# Altium PCB PCB - Break-Out.PcbDoc
Units mm, origin at the board's own origin, x right, y up, seen from the top; angles counter-clockwise.
Board outline 230 x 230 mm, 6 copper layers (Top Layer, Layer 2, Layer 3, Layer 4, Layer 5, Bottom Layer), stack 1.538 mm thick; 8 components, 247 nets, 205 pads, 0 vias.
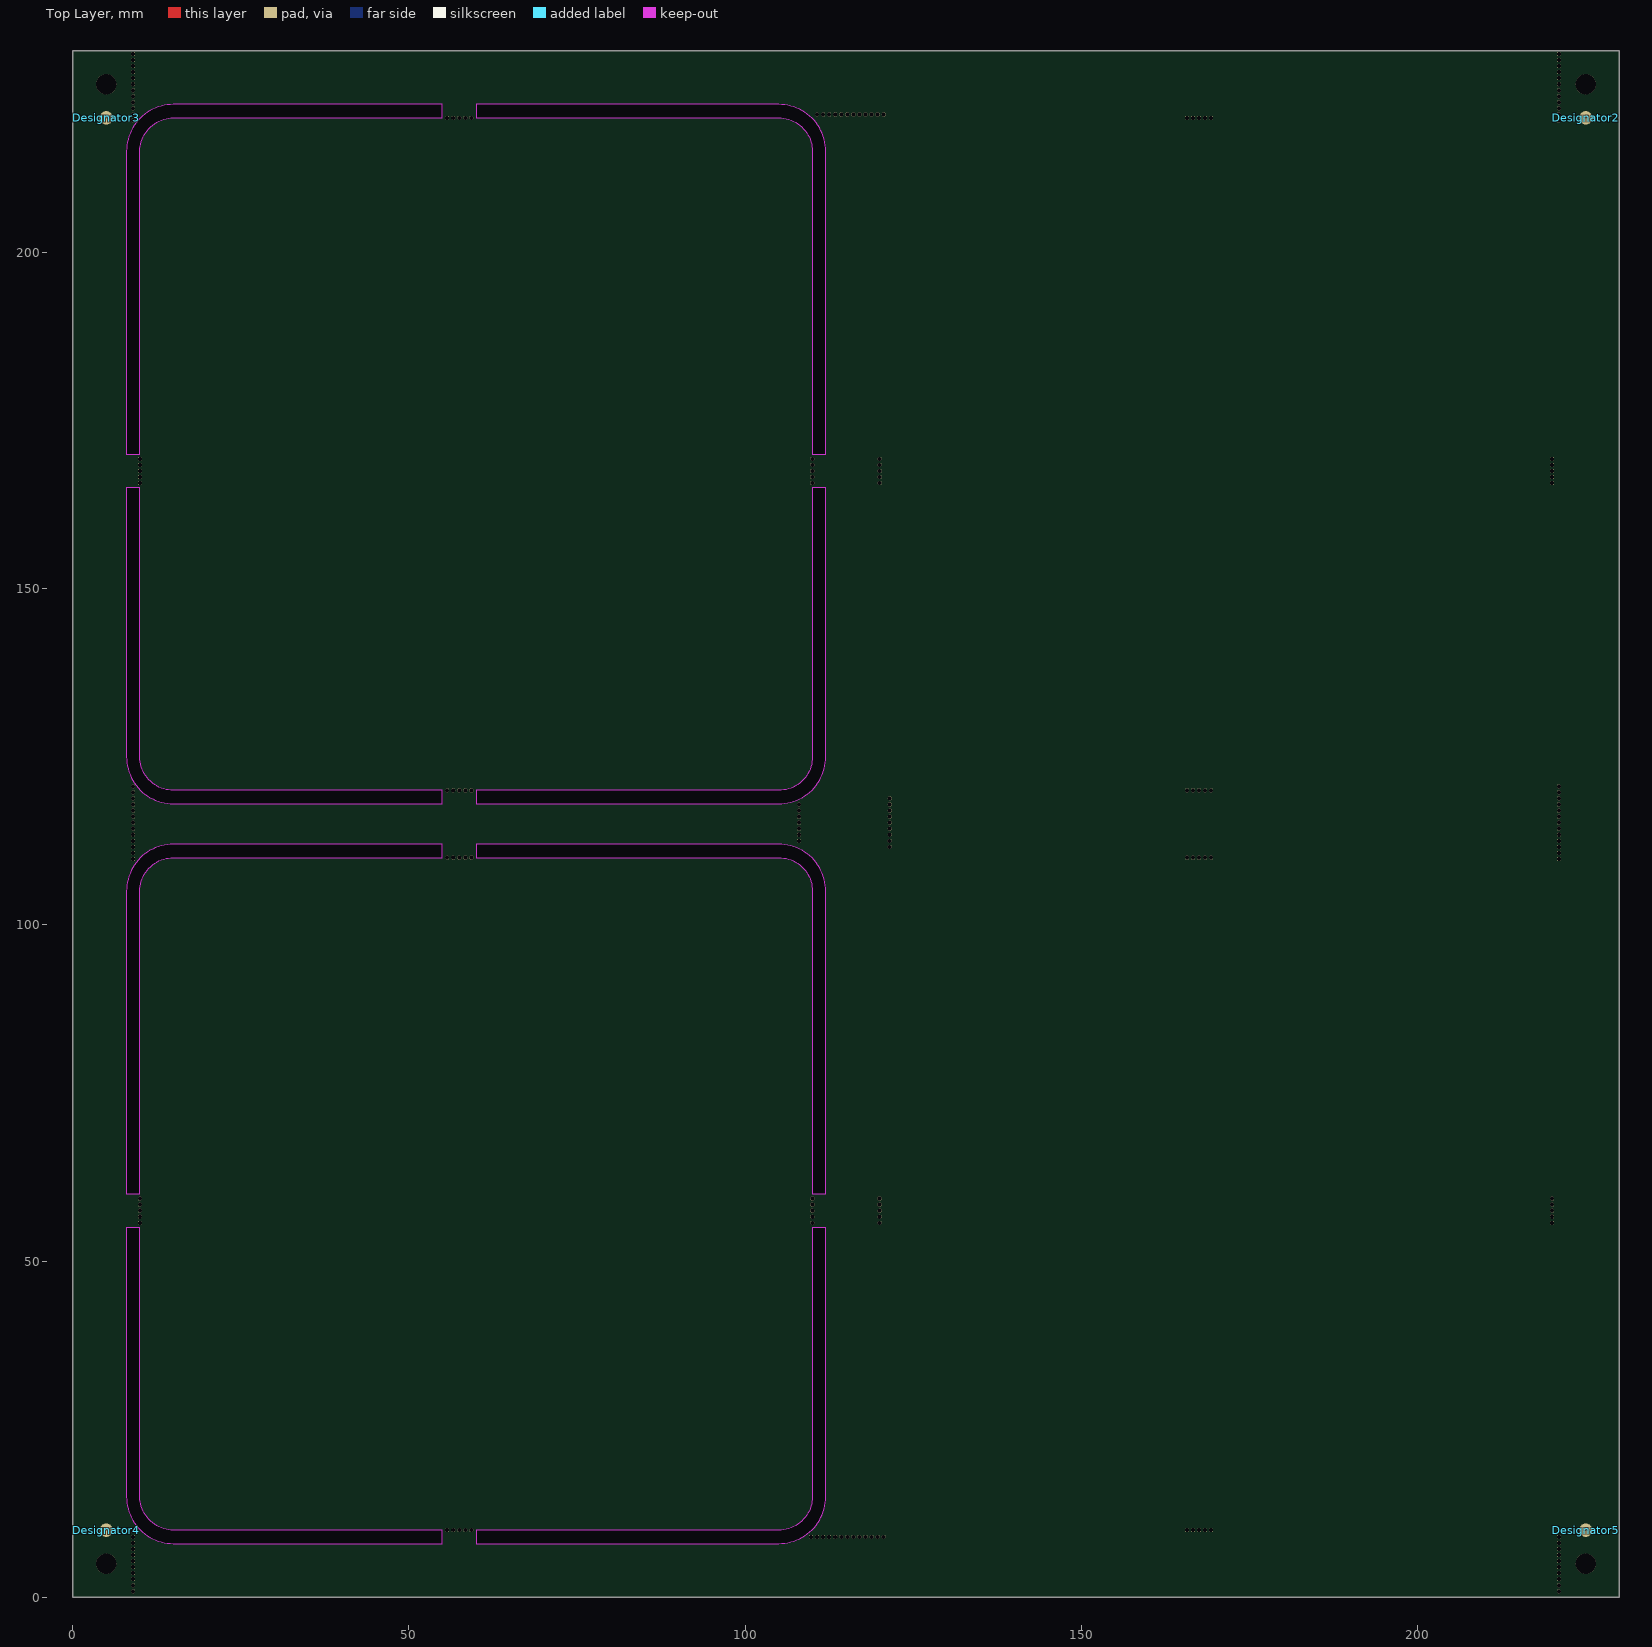
[diagram p0: Top Layer view]
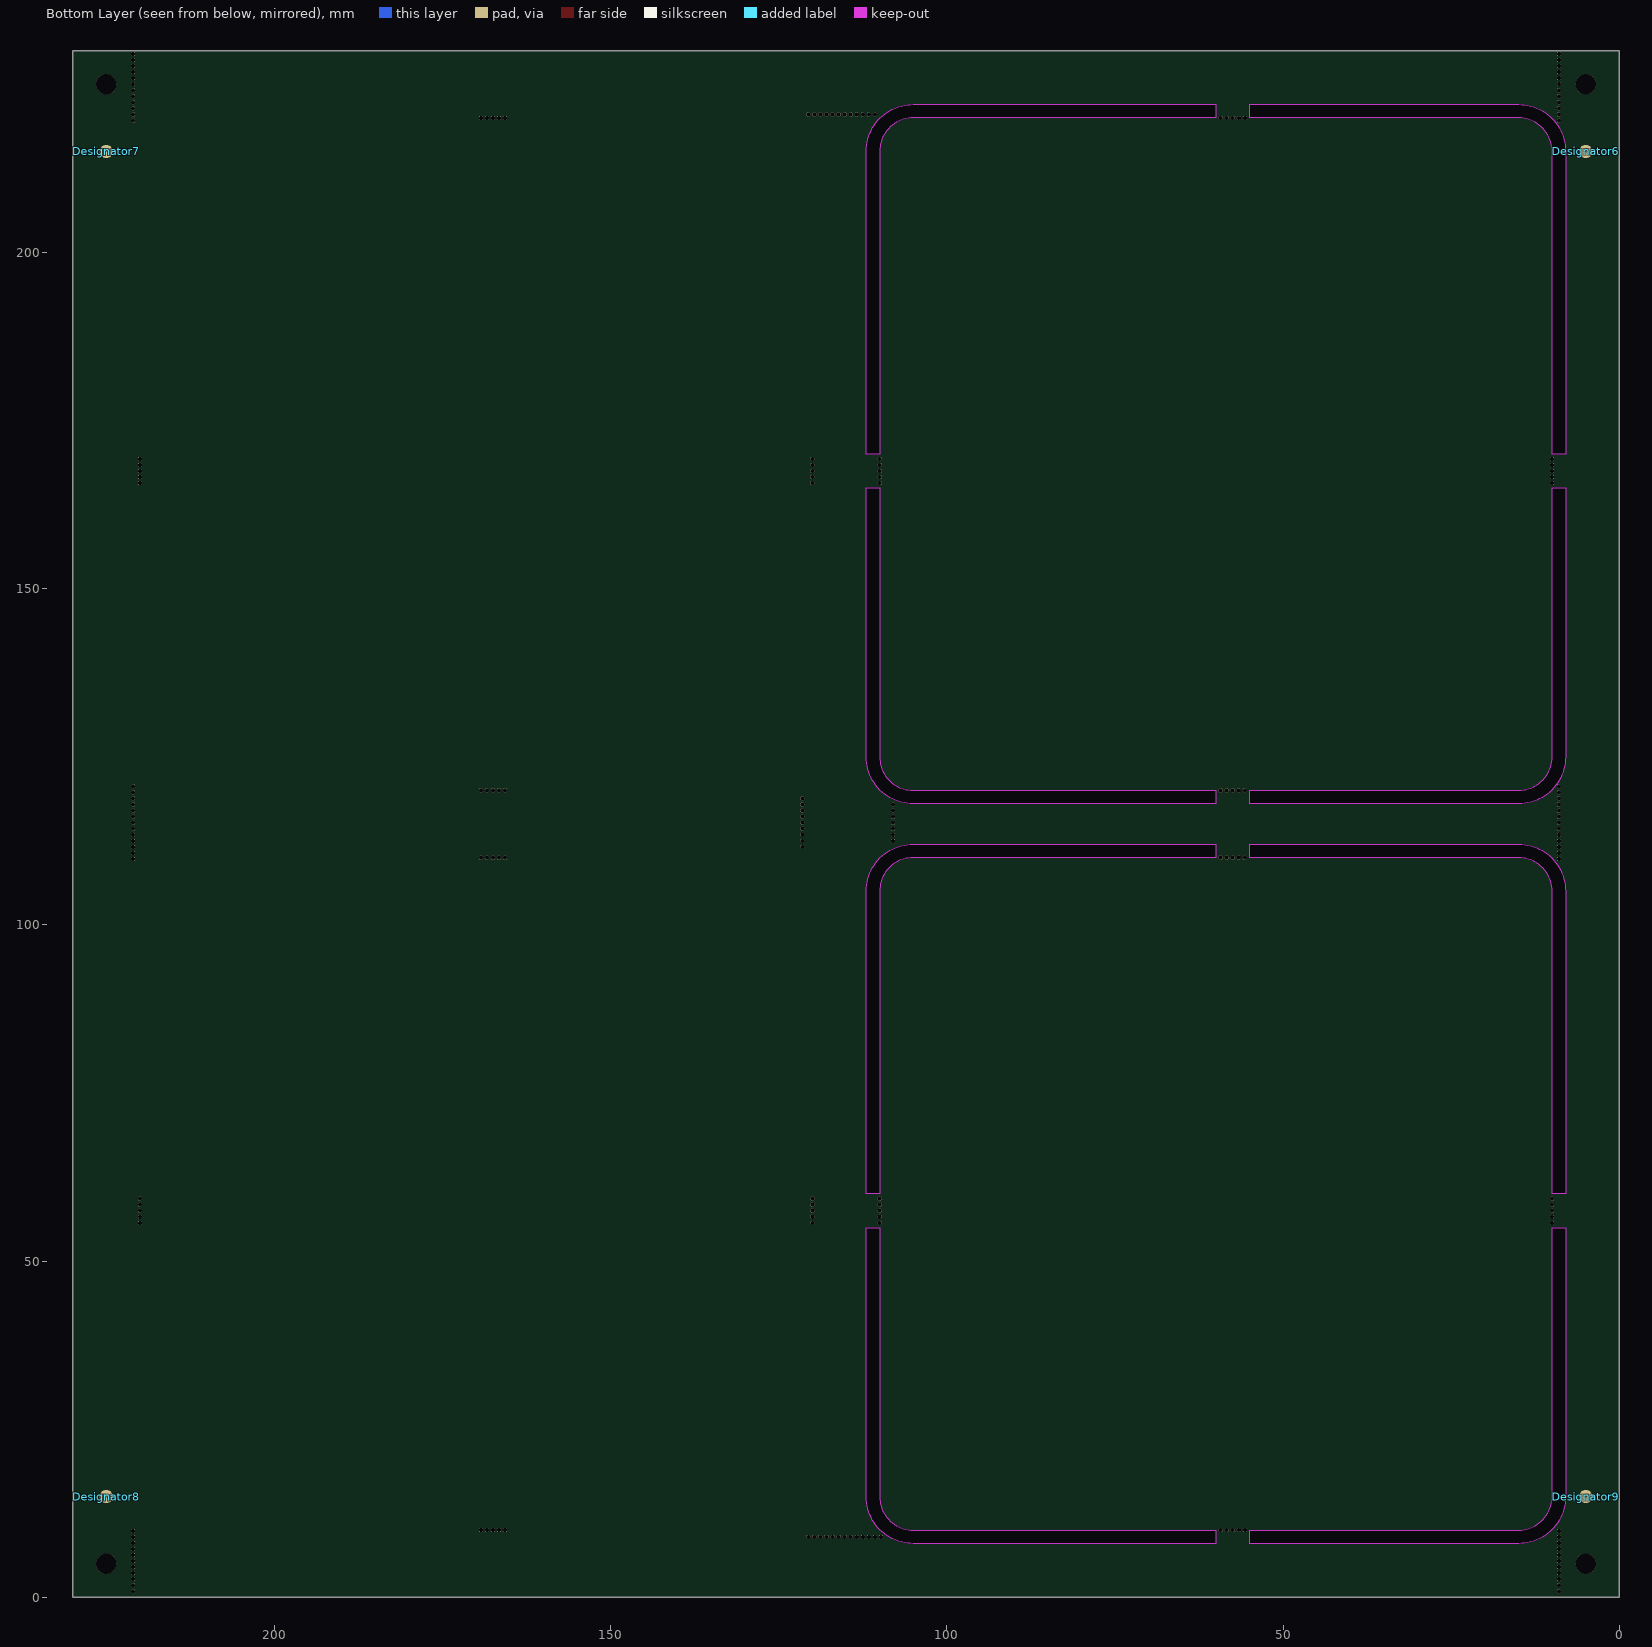
[diagram p1: Bottom Layer view, seen from below]
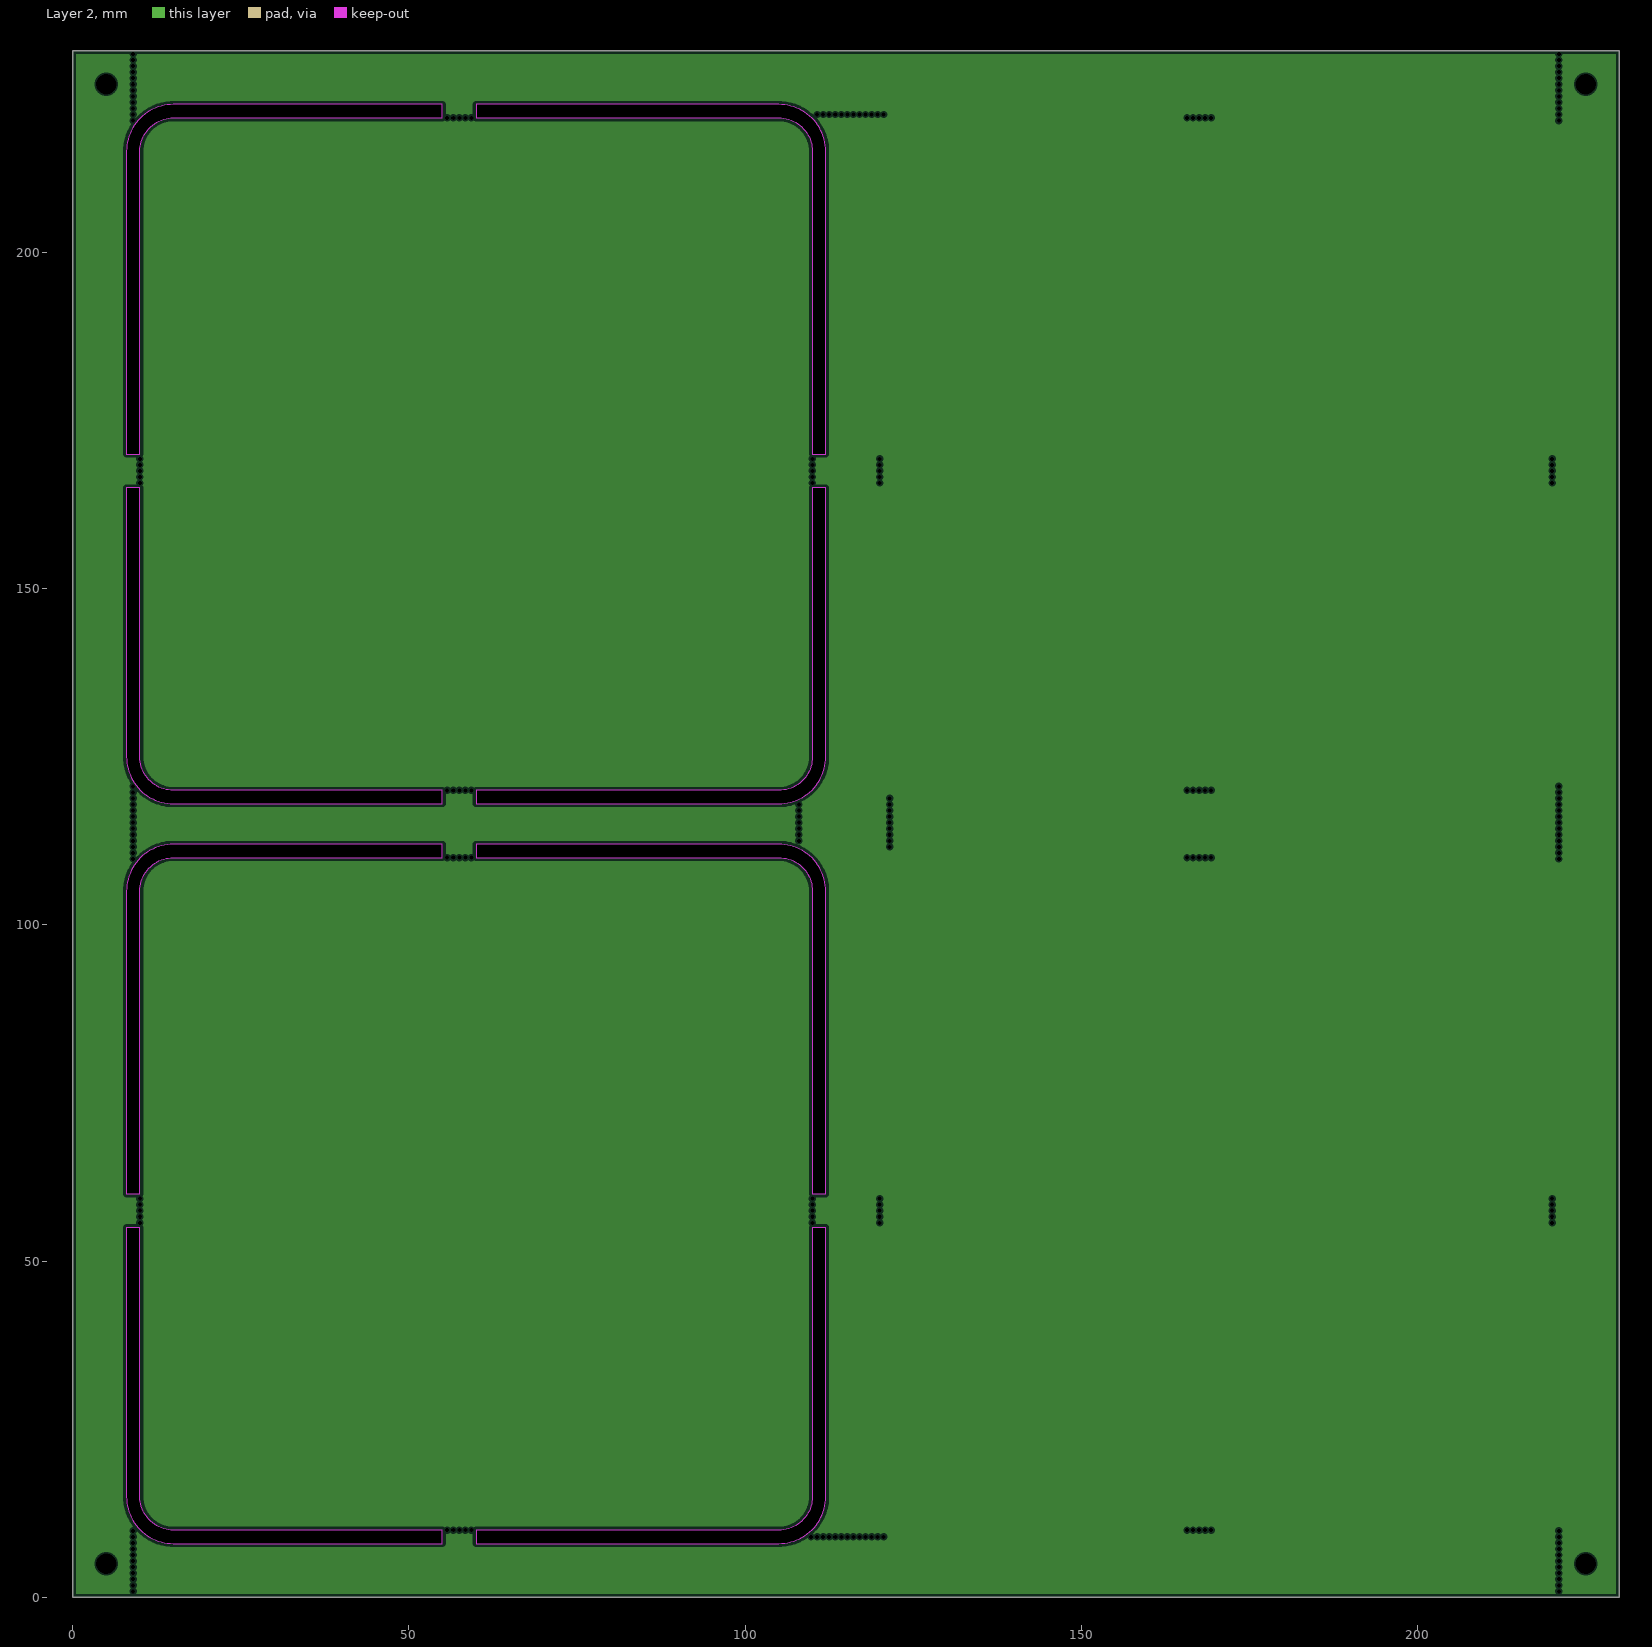
[diagram p2: Layer 2, clearances drawn from the general rule]
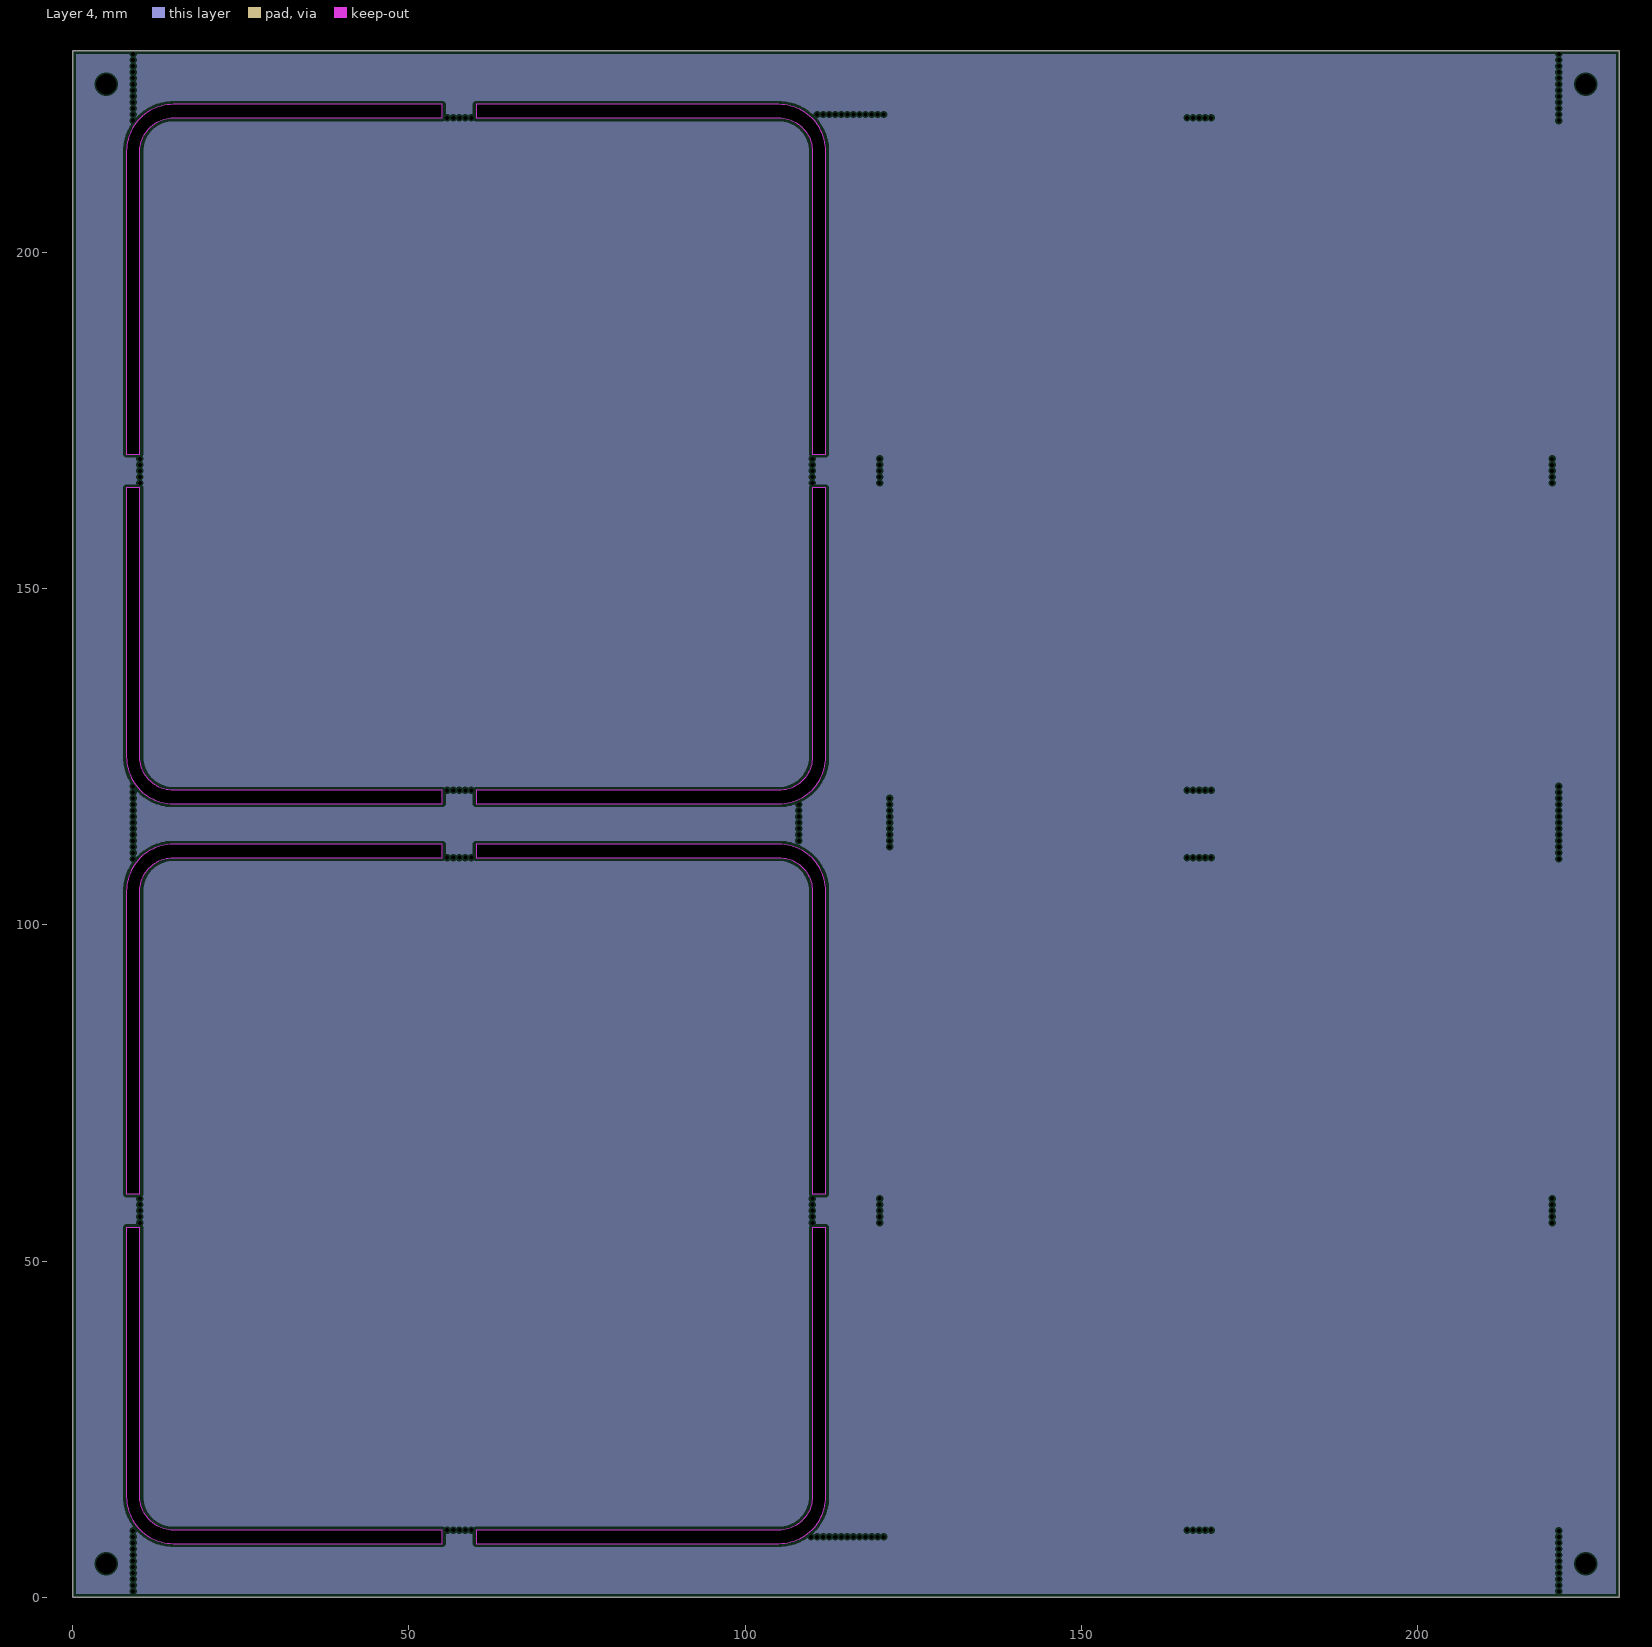
[diagram p3: Layer 4, clearances drawn from the general rule]
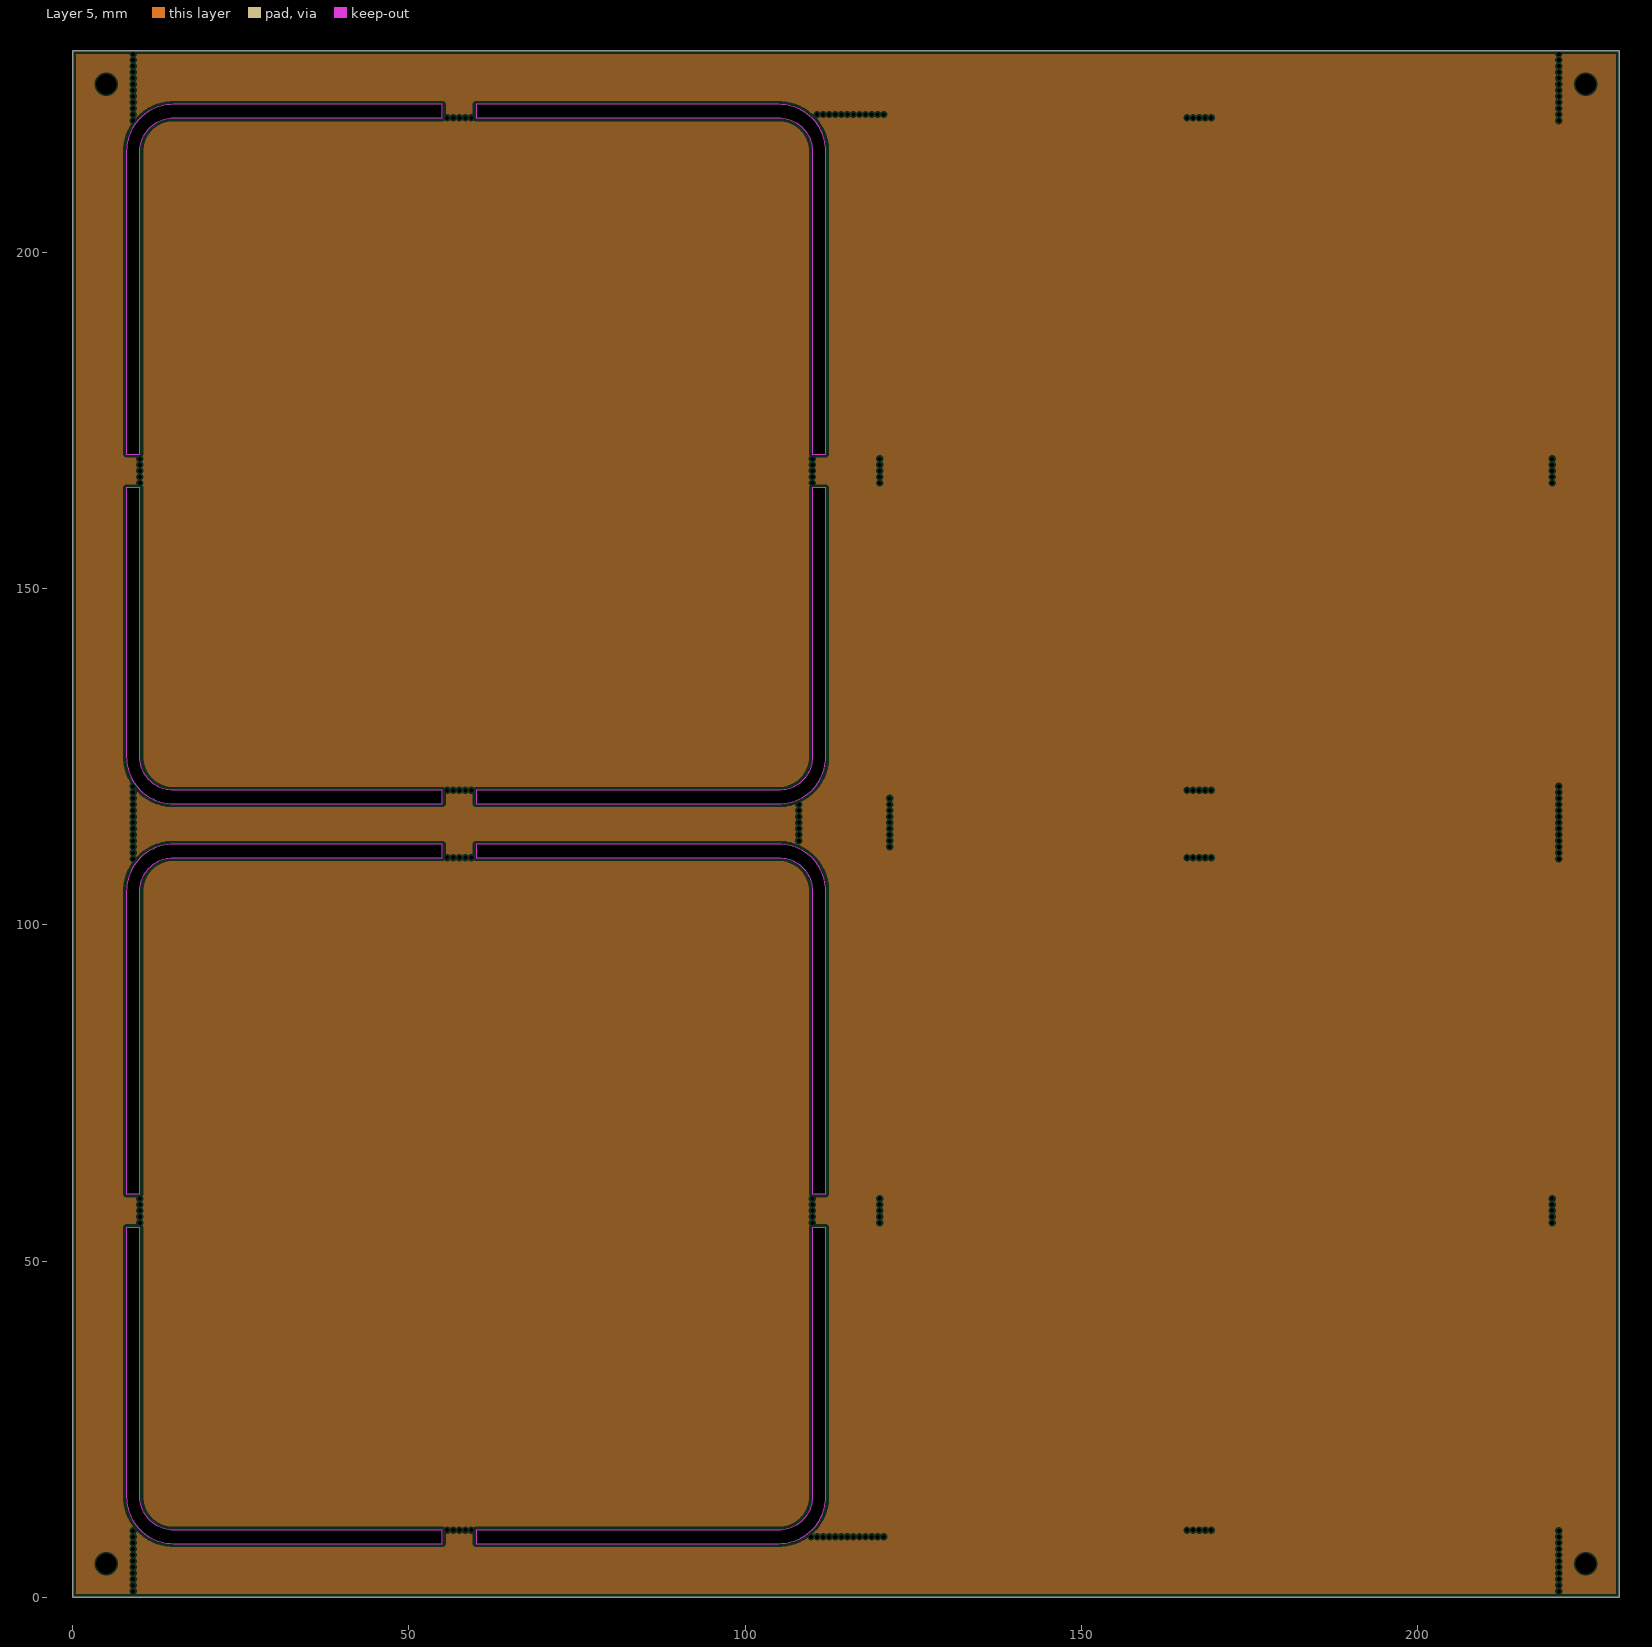
[diagram p4: Layer 5, clearances drawn from the general rule]

## Layer stack, top to bottom
Top Solder: solder mask 0.01, Solder Resist, Dk 3.5
Top Layer: signal copper 0.035
Dielectric 2: prepreg 0.0994, 3313*1, Dk 4.1
Layer 2: plane copper 0.0152, net Gnd
Dielectric 4: core 0.55, Core, Dk 4.1
Layer 3: signal copper 0.0152
Dielectric 1: prepreg 0.1088, 2116*1, Dk 4.8
Layer 4: plane copper 0.0152, net 3.3V
Dielectric 5: core 0.55, Core, Dk 4.1
Layer 5: plane copper 0.0152, net Gnd
Dielectric 3: prepreg 0.0994, 3313*1, Dk 4.1
Bottom Layer: signal copper 0.035
Bottom Solder: solder mask 0.01, Solder Resist, Dk 3.5

## Board outline
0,230 230,230 230,0 0,0
cut-out: 10,60 10,105 cw(c15,105) 15,110 55,110 55,112 15,112 ccw(c15,105) 8,105 8,60
cut-out: 55,10 15,10 cw(c15,15) 10,15 10,55 8,55 8,15 ccw(c15,15) 15,8 55,8
cut-out: 110,55 110,15 cw(c105,15) 105,10 60,10 60,8 105,8 ccw(c105,15) 112,15 112,55
cut-out: 60,110 105,110 cw(c105,105) 110,105 110,60 112,60 112,105 ccw(c105,105) 105,112 60,112
cut-out: 60,220 105,220 cw(c105,215) 110,215 110,170 112,170 112,215 ccw(c105,215) 105,222 60,222
cut-out: 110,165 110,125 cw(c105,125) 105,120 60,120 60,118 105,118 ccw(c105,125) 112,125 112,165
cut-out: 55,120 15,120 cw(c15,125) 10,125 10,165 8,165 8,125 ccw(c15,125) 15,118 55,118
cut-out: 10,170 10,215 cw(c15,215) 15,220 55,220 55,222 15,222 ccw(c15,215) 8,215 8,170

## Design rules (kind name [scope] priority, off if disabled: settings)
BoardOutlineClearance [Not OnLayer('Top Overlay')] p1: gap=0.3 ignorepadtopadclearanceinfootprint=FALSE
Clearance Polygons [InNet('Gnd') vs (InNet('Gcan') Or InNet('Chassis'))] p1: gap=0.2 ignorepadtopadclearanceinfootprint=FALSE except(0.127: SMDPad-SMDPad; 1: Poly-Poly)
Clearance [All] p2: gap=0.2 ignorepadtopadclearanceinfootprint=FALSE except(0.127: SMDPad-SMDPad)
DiffPairsRouting "Usb 90 Ohm" [InDifferentialPairClass('Usb_90')] p1: maxlimit=0.203 minlimit=0.203 mostfreqgap=0.203 toplayer_minwidth=0.158 toplayer_maxwidth=0.158 toplayer_prefwidth=0.158 midlayer1_minwidth=0.321 midlayer1_maxwidth=0.321 midlayer1_prefwidth=0.321 bottomlayer_minwidth=0.158 bottomlayer_maxwidth=0.158 bottomlayer_prefwidth=0.158 maxuncoupledlength=12.7
DiffPairsRouting "Rs422-Can 120 Ohm" [InDifferentialPairClass('Rs422_120') Or InDifferentialPairClass('Can_120')] p2: maxlimit=0.508 minlimit=0.508 mostfreqgap=0.508 toplayer_minwidth=0.096 toplayer_maxwidth=0.098 toplayer_prefwidth=0.097 midlayer1_minwidth=0.261 midlayer1_maxwidth=0.261 midlayer1_prefwidth=0.261 bottomlayer_minwidth=0.096 bottomlayer_maxwidth=0.098 bottomlayer_prefwidth=0.097 maxuncoupledlength=12.7
DiffPairsRouting "Eth 100 Ohm" [InDifferentialPairClass('Eth_100')] p3: maxlimit=0.203 minlimit=0.203 mostfreqgap=0.203 toplayer_minwidth=0.124 toplayer_maxwidth=0.124 toplayer_prefwidth=0.124 midlayer1_minwidth=0.232 midlayer1_maxwidth=0.232 midlayer1_prefwidth=0.232 bottomlayer_minwidth=0.124 bottomlayer_maxwidth=0.124 bottomlayer_prefwidth=0.124 maxuncoupledlength=12.7
HoleSize "Mounting Hole" [HasFootprint('Mounting Hole - Hole-3.2mm, Pad-5mm')] p1: absolutevalues=TRUE maxlimit=5 minlimit=0.29 maxpercent=80.000 minpercent=20.000
HoleSize "USB Conn" [HasFootprint('GCT, USB4056')] p2: absolutevalues=TRUE maxlimit=5 minlimit=0.29 maxpercent=80.000 minpercent=20.000
HoleSize NonViaHoleSize [Not IsVia] p3: absolutevalues=TRUE maxlimit=5 minlimit=0.5 maxpercent=80.000 minpercent=20.000
HoleSize ViaHoleSize [IsVia] p4: absolutevalues=TRUE maxlimit=5 minlimit=0.3 maxpercent=80.000 minpercent=20.000
HoleToHoleClearance "Mounting Hole (Clearance)" [HasFootprint('Mounting Hole - Hole-3.2mm, Pad-5mm') vs HasFootprint('Mounting Hole - Hole-3.2mm, Pad-5mm')] p1: gap=0.29 allowstackedmicrovias=TRUE
HoleToHoleClearance "USB Conn (Clearance)" [HasFootprint('GCT, USB4056') vs HasFootprint('GCT, USB4056')] p2: gap=0.39 allowstackedmicrovias=TRUE
HoleToHoleClearance [All] p3: gap=0.5 allowstackedmicrovias=TRUE
MatchedLengths LM-EthP [InNetClass('EthP')] p1: tolerance=1 checknetsindiffpair=FALSE checkdiffpairvsdiffpair=TRUE checkxsignals=TRUE checkothers=TRUE
MatchedLengths LM-EthC [InNetClass('EthC')] p2: tolerance=1 checknetsindiffpair=FALSE checkdiffpairvsdiffpair=TRUE checkxsignals=TRUE checkothers=TRUE
MatchedLengths LM-EthP_Dp [InNetClass('EthP')] p3: tolerance=1 checknetsindiffpair=TRUE checkdiffpairvsdiffpair=FALSE checkxsignals=FALSE checkothers=FALSE
MatchedLengths LM-EthC_Dp [InNetClass('EthC')] p4: tolerance=1 checknetsindiffpair=TRUE checkdiffpairvsdiffpair=FALSE checkxsignals=FALSE checkothers=FALSE
MatchedLengths SPI-LM [InxSignalClass('xSPI')] p5: tolerance=1 checknetsindiffpair=FALSE checkdiffpairvsdiffpair=TRUE checkxsignals=TRUE checkothers=TRUE
MatchedLengths LM-I2C [InNetClass('I2C_LM')] p6: tolerance=1 checknetsindiffpair=FALSE checkdiffpairvsdiffpair=TRUE checkxsignals=TRUE checkothers=TRUE
MinimumAnnularRing [All] p1: minimumring=0.05
MinimumSolderMaskSliver [All] p1: minsoldermaskwidth=0.1
PlaneClearance [All] p1: clearance=0.25
PlaneConnect [All] p1: planeconnectstyle=Direct reliefexpansion=0.508 reliefentries=4 reliefconductorwidth=0.254 reliefairgap=0.254
PolygonConnect [All] p1: thpad.connectstyle=Relief thpad.reliefconductorwidth=0.254 thpad.reliefentries=4 thpad.polygonreliefangle="90 Angle" thpad.airgapwidth=0.25 smdpad.connectstyle=Relief smdpad.reliefconductorwidth=0.254 smdpad.reliefentries=4 smdpad.polygonreliefangle="90 Angle" smdpad.airgapwidth=0.25 via.connectstyle=Direct via.reliefconductorwidth=0.254 via.reliefentries=4 via.polygonreliefangle="90 Angle" via.airgapwidth=0.25
RoutingVias [All] p1: holewidth=0.711 width=1.27 viastyle="Through Hole" minholewidth=0.711 minwidth=1.27 maxholewidth=0.711 maxwidth=1.27
SilkToSilkClearance [Not HasFootprint('Logo 1') vs Not HasFootprint('Logo 1')] p1: silktosilkclearance=0.05
SilkToSolderMaskClearance [IsPad And (Not HasFootprint('Resistor_Smd_M1005_I0402'))] p1: minsilkscreentomaskgap=0.15 clearancetoexposedcopper=TRUE
SolderMaskExpansion [All] p1: expansion=0.05 istentingtop=FALSE
Width [All] p1: maxlimit=10 minlimit=0.089 preferedwidth=0.2 minimp=50.000000 maximp=50.000000 favimp=50.000000
22 further rules are at their usual default settings.

## Classes and differential pairs
net class EthP: RXP_N RXP_P TXP_N TXP_P
net class EthC: RXC_N RXC_P TXC_N TXC_P
net class I2C_LM: PB6 PB7
differential pair class Usb_90: U Usb
differential pair class Rs422_120: AB CTS RTS YZ
differential pair class Eth_100: RXC RXP TXC TXP
differential pair class Can_120: CAN
channel class Switch: Sw1 Sw2 Sw3
channel class "Led Driver": LdG LdO LdR LdY
channel class Button: Bt1 Bt2 Bt3
net class PE[0..15]: PE0 PE1 PE2 PE3 PE4 PE5 PE6 PE7 PE8 PE9 PE10 PE11 PE12 PE13 PE14 PE15
net class PD[0..15]: PD0 PD1 PD2 PD3 PD4 PD5 PD6 PD7 PD8 PD9 PD10 PD11 PD12 PD13 PD14 PD15
net class PC[0..15]: PC0 PC1 PC2 PC3 PC4 PC5 PC6 PC7 PC8 PC9 PC10 PC11 PC12 PC13 PC14 PC15
net class PB[0..15]: PB0 PB1 PB2 PB3 PB4 PB5 PB6 PB7 PB8 PB9 PB10 PB11 PB12 PB13 PB14 PB15
net class PA[0..15]: PA0 PA1 PA2 PA3 PA4 PA5 PA6 PA7 PA8 PA9 PA10 PA11 PA12 PA13 PA14 PA15
differential pair YZ: +YZ_P -YZ_N
differential pair U: +U_P -U_N
differential pair Usb: +Usb_P -Usb_N
differential pair TXP: +TXP_P -TXP_N
differential pair TXC: +TXC_P -TXC_N
differential pair RXP: +RXP_P -RXP_N
differential pair RXC: +RXC_P -RXC_N
differential pair RTS: +RTS_P -RTS_N
differential pair CTS: +CTS_P -CTS_N
differential pair CAN: +CAN_P -CAN_N
differential pair AB: +AB_P -AB_N

## Components (designator, comment, footprint, x,y, rotation, side; value= is the part's Value field where it differs from the comment)
Designator2 "Comment" "Fiducial, Panel - 2mm, 5mm" 225,220 r0 top
Designator3 "Comment" "Fiducial, Panel - 2mm, 5mm" 5,220 r0 top
Designator4 "Comment" "Fiducial, Panel - 2mm, 5mm" 5,10 r0 top
Designator5 "Comment" "Fiducial, Panel - 2mm, 5mm" 225,10 r0 top
Designator6 "Comment" "Fiducial, Panel - 2mm, 5mm" 5,215 r180 bottom
Designator7 "Comment" "Fiducial, Panel - 2mm, 5mm" 225,215 r180 bottom
Designator8 "Comment" "Fiducial, Panel - 2mm, 5mm" 225,15 r180 bottom
Designator9 "Comment" "Fiducial, Panel - 2mm, 5mm" 5,15 r180 bottom

## Footprints (in the part's own frame and the unit in brackets; to place one, negate y for a bottom-side part, rotate by r counter-clockwise, add the part's x,y. Pads: shape width x height; smd on the part's side, far side on the other; paste and mask are expansions set on the pad)
"Fiducial, Panel - 2mm, 5mm" [mm] "Fiducial, Panel - 2mm, 5mm"
  round 2 smd paste+0 mask+1.5: TP(0,0)
  Top Layer pour cut-out: 2.5,2.5 0.915,3.415 -0.915,3.415 -2.5,2.5 -2.5,2.5 -3.266,1.353 -3.536,0 -3.266,-1.353 -2.5,-2.5 -2.5,-2.5 -1.353,-3.266 0,-3.536 1.353,-3.266 2.5,-2.5 2.5,-2.5 3.415,-0.915 3.415,0.915 2.5,2.5

## Free pads (board coordinates)
  round 3 hole 3 unplated: 0(5,5) 0(5,225) 0(225,5) 0(225,225)
  round 0.6 hole 0.6 unplated: 0(9,0.9) 0(9,1.8) 0(9,2.7) 0(9,3.6) 0(9,4.5) 0(9,5.4) 0(9,6.3) 0(9,7.2) 0(9,8.1) 0(9,9) 0(9,9.9) 0(9,109.8) 0(9,110.7) 0(9,111.6) 0(9,112.5) 0(9,113.4) 0(9,114.3) 0(9,115.2) 0(9,116.1) 0(9,117) 0(9,117.9) 0(9,118.8) 0(9,119.7) 0(9,120.6) 0(9,219.6) 0(9,220.5) 0(9,221.4) 0(9,222.3) 0(9,223.2) 0(9,224.1) 0(9,225) 0(9,225.9) 0(9,226.8) 0(9,227.7) 0(9,228.6) 0(9,229.5) 0(10,55.7) 0(10,56.6) 0(10,57.5) 0(10,58.4) 0(10,59.3) 0(10,165.7) 0(10,166.6) 0(10,167.5) 0(10,168.4) 0(10,169.3) 0(55.7,10) 0(55.7,110) 0(55.7,120) 0(55.7,220) 0(56.6,10) 0(56.6,110) 0(56.6,120) 0(56.6,220) 0(57.5,10) 0(57.5,110) 0(57.5,120) 0(57.5,220) 0(58.4,10) 0(58.4,110) 0(58.4,120) 0(58.4,220) 0(59.3,10) 0(59.3,110) 0(59.3,120) 0(59.3,220) 0(108,112.5) 0(108,113.4) 0(108,114.3) 0(108,115.2) 0(108,116.1) 0(108,117) 0(108,117.9) 0(109.8,9) 0(110,55.7) 0(110,56.6) 0(110,57.5) 0(110,58.4) 0(110,59.3) 0(110,165.7) 0(110,166.6) 0(110,167.5) 0(110,168.4) 0(110,169.3) 0(110.7,220.5) 0(110.7,9) 0(111.6,9) 0(111.6,220.5) 0(112.5,220.5) 0(112.5,9) 0(113.4,220.5) 0(113.4,9) 0(114.3,220.5) 0(114.3,9) 0(115.2,9) 0(115.2,220.5) 0(116.1,220.5) 0(116.1,9) 0(117,220.5) 0(117,9) 0(117.9,9) 0(117.9,220.5) 0(118.8,220.5) 0(118.8,9) 0(119.7,9) 0(119.7,220.5) 0(120,55.7) 0(120,56.6) 0(120,57.5) 0(120,58.4) 0(120,59.3) 0(120,165.7) 0(120,166.6) 0(120,167.5) 0(120,168.4) 0(120,169.3) 0(120.6,9) 0(120.6,220.5) 0(121.5,111.6) 0(121.5,112.5) 0(121.5,113.4) 0(121.5,114.3) 0(121.5,115.2) 0(121.5,116.1) 0(121.5,117) 0(121.5,117.9) 0(121.5,118.8) 0(165.7,10) 0(165.7,110) 0(165.7,120) 0(165.7,220) 0(166.6,10) 0(166.6,110) 0(166.6,120) 0(166.6,220) 0(167.5,10) 0(167.5,110) 0(167.5,120) 0(167.5,220) 0(168.4,10) 0(168.4,110) 0(168.4,120) 0(168.4,220) 0(169.3,10) 0(169.3,110) 0(169.3,120) 0(169.3,220) 0(220,55.7) 0(220,56.6) 0(220,57.5) 0(220,58.4) 0(220,59.3) 0(220,165.7) 0(220,166.6) 0(220,167.5) 0(220,168.4) 0(220,169.3) 0(221,0.9) 0(221,1.8) 0(221,2.7) 0(221,3.6) 0(221,4.5) 0(221,5.4) 0(221,6.3) 0(221,7.2) 0(221,8.1) 0(221,9) 0(221,9.9) 0(221,109.8) 0(221,110.7) 0(221,111.6) 0(221,112.5) 0(221,113.4) 0(221,114.3) 0(221,115.2) 0(221,116.1) 0(221,117) 0(221,117.9) 0(221,118.8) 0(221,119.7) 0(221,120.6) 0(221,219.6) 0(221,220.5) 0(221,221.4) 0(221,222.3) 0(221,223.2) 0(221,224.1) 0(221,225) 0(221,225.9) 0(221,226.8) 0(221,227.7) 0(221,228.6) 0(221,229.5)

## Nets (pads, with @x,y where several pads share a name; then routed paths per layer and width w, separated by ;. In a path a pad name is that pad's centre, name@x,y a point inside that pad or via, vN(x,y) a via of type N, cw(c..) or ccw(c..) an arc to the next point about the centre after c; other vN are vias at no path point)
3.3V: 
3.3V_AP: 
3.3V_ETH: 
3.3V_FT: 
3.3V_LCD: 
3.3V_RT: 
5V: 
5V_AP: 
5V_LCD: 
5V_RT: 
AB_N: 
AB_P: 
ACT_ANEN: 
Boot0: 
CAN_N: 
CAN_P: 
ChassisE: 
ChassisU: 
CTS_N: 
CTS_P: 
Gcan: 
Gnd: 
LINK_AN0: 
NetC100_1: 
NetC100_2: 
NetC103_2: 
NetC106_1: 
NetC107_1: 
NetC110_2: 
NetC200_1: 
NetC201_1: 
NetC202_1: 
NetC203_1: 
NetC600_1: 
NetC602_1: 
NetC620_1: 
NetC621_1: 
NetC622_1: 
NetC623_1: 
NetC623_2: 
NetC624_1: 
NetC624_2: 
NetC701_1: 
NetC702_1: 
NetC714_1: 
NetC716_1: 
NetC717_1: 
NetC718_1: 
NetC740_1: 
NetC751_1: 
NetConn141_1: 
NetConn141_3: 
NetConn141_4: 
NetConn141_6: 
NetConn200_1: 
NetConn200_3: 
NetConn200_5: 
NetConn200_7: 
NetConn200_9: 
NetConn200_11: 
NetConn200_13: 
NetConn200_15: 
NetConn201_1: 
NetConn201_3: 
NetConn201_5: 
NetConn201_7: 
NetConn201_9: 
NetConn201_11: 
NetConn201_13: 
NetConn201_15: 
NetConn600_1: 
NetConn600_4: 
NetConn620_1: 
NetConn620_3: 
NetConn620_4: 
NetConn620_6: 
NetConn700_3: 
NetConn700_5: 
NetConn700_7: 
NetConn700_9: 
NetConn700_13: 
NetConn700_15: 
NetConn740_L1-C: 
NetConn740_L2-C: 
NetD101_C: 
NetD102_C: 
NetD103_A: 
NetD200_A: 
NetD200_C: 
NetD201_A: 
NetD201_C: 
NetD202_A: 
NetD202_C: 
NetD203_A: 
NetD203_C: 
NetD660_C: 
NetD661_C: 
NetD662_C: 
NetD740_C: 
NetIC100_3-EN: 
NetIC100_7-RT: 
NetIC101_6: 
NetIC101_7: 
NetIC620_9: 
NetIC620_12: 
NetIC640_2: 
NetIC640_5: 
NetIC640_6: 
NetIC640_7: 
NetIC640_8: 
NetIC641_2: 
NetIC641_5: 
NetIC641_6: 
NetIC641_7: 
NetIC641_8: 
NetIC660_LED+: 
NetIC660_SCL: 
NetIC660_SDA: 
NetIC660_V0: 
NetIC661_7: 
NetIC662_5: 
NetIC662_11: 
NetIC662_14: 
NetIC700_12: 
NetIC700_13: 
NetIC740_20: 
NetIC740_21: 
NetIC740_24: 
NetIC740_29: 
NetIC740_39: 
NetMHBL_Hole: 
NetMHBR_Hole: 
NetMHTL_Hole: 
NetMHTR_Hole: 
NetR40_Bt1_1: 
NetR40_Bt2_1: 
NetR40_Bt3_1: 
NetR60_Sw1_1: 
NetR60_Sw2_1: 
NetR60_Sw3_1: 
NetR105_2: 
NetR706_2: 
NetR755_1: 
NetR756_1: 
NRST: 
PA0: 
PA1: 
PA2: 
PA3: 
PA4: 
PA5: 
PA6: 
PA7: 
PA8: 
PA9: 
PA10: 
PA11: 
PA12: 
PA13: 
PA14: 
PA15: 
PB0: 
PB1: 
PB2: 
PB3: 
PB4: 
PB5: 
PB6: 
PB7: 
PB8: 
PB9: 
PB10: 
PB11: 
PB12: 
PB13: 
PB14: 
PB15: 
PC0: 
PC1: 
PC2: 
PC3: 
PC4: 
PC5: 
PC6: 
PC7: 
PC8: 
PC9: 
PC10: 
PC11: 
PC12: 
PC13: 
PC14: 
PC15: 
PD0: 
PD1: 
PD2: 
PD3: 
PD4: 
PD5: 
PD6: 
PD7: 
PD8: 
PD9: 
PD10: 
PD11: 
PD12: 
PD13: 
PD14: 
PD15: 
PE0: 
PE1: 
PE2: 
PE3: 
PE4: 
PE5: 
PE6: 
PE7: 
PE8: 
PE9: 
PE10: 
PE11: 
PE12: 
PE13: 
PE14: 
PE15: 
RTS_N: 
RTS_P: 
RXC_N: 
RXC_P: 
RXP_N: 
RXP_P: 
SPD_AN1: 
TXC_N: 
TXC_P: 
TXP_N: 
TXP_P: 
U_N: 
U_P: 
Usb_N: 
Usb_P: 
VBus: 
VBusSense: 
Vcan: 
VCC_422: 
Vdd: 
YZ_N: 
YZ_P: 
pads on no net: Designator2.TP Designator3.TP Designator4.TP Designator5.TP Designator6.TP Designator7.TP Designator8.TP Designator9.TP

## Polygon pours and split planes (outlines as drawn)
ChassisE on Layer 2 (split plane): 229.49,0.51 0.51,0.51 0.51,229.49 229.49,229.49
ChassisE on Layer 4 (split plane): 229.49,0.51 0.51,0.51 0.51,229.49 229.49,229.49
ChassisE on Layer 5 (split plane): 229.49,0.51 0.51,0.51 0.51,229.49 229.49,229.49

## Silkscreen, mask and mechanical layers (free items; w line width, h text height)
Mechanical 1:
  lines w1: 8,55 10,55 ; 8,60 10,60 ; 8,165 10,165 ; 8,170 10,170 ; 55,8 55,10 ; 55,110 55,112 ; 55,118 55,120 ; 55,220 55,222 ; 60,8 60,10 ; 60,110 60,112 ; 60,118 60,120 ; 60,220 60,222 ; 110,55 112,55 ; 110,60 112,60 ; 110,165 112,165 ; 110,170 112,170 ; 118,55 120,55 ; 118,60 120,60 ; 118,165 120,165 ; 118,170 120,170 ; 125,8 cw(c125,15) 118,15 118,105 cw(c125,105) 125,112 215,112 cw(c215,105) 222,105 222,15 cw(c215,15) 215,8 125,8 ; 125,118 cw(c125,125) 118,125 118,215 cw(c125,215) 125,222 215,222 cw(c215,215) 222,215 222,125 cw(c215,125) 215,118 125,118 ; 165,8 165,10 ; 165,110 165,112 ; 165,118 165,120 ; 165,220 165,222 ; 170,8 170,10 ; 170,110 170,112 ; 170,118 170,120 ; 170,220 170,222 ; 220,55 222,55 ; 220,60 222,60 ; 220,165 222,165 ; 220,170 222,170 ; 8,15 ccw(c15,15) 15,8 105,8 ccw(c105,15) 112,15 112,105 ccw(c105,105) 105,112 15,112 ccw(c15,105) 8,105 8,15 ; 8,125 ccw(c15,125) 15,118 105,118 ccw(c105,125) 112,125 112,215 ccw(c105,215) 105,222 15,222 ccw(c15,215) 8,215 8,125 ; 10,15 ccw(c15,15) 15,10 105,10 ccw(c105,15) 110,15 110,105 ccw(c105,105) 105,110 15,110 ccw(c15,105) 10,105 10,15 ; 10,125 ccw(c15,125) 15,120 105,120 ccw(c105,125) 110,125 110,215 ccw(c105,215) 105,220 15,220 ccw(c15,215) 10,215 10,125 ; 120,15 ccw(c125,15) 125,10 215,10 ccw(c215,15) 220,15 220,105 ccw(c215,105) 215,110 125,110 ccw(c125,105) 120,105 120,15 ; 120,125 ccw(c125,125) 125,120 215,120 ccw(c215,125) 220,125 220,215 ccw(c215,215) 215,220 125,220 ccw(c125,215) 120,215 120,125
Route Tool Path:
  lines w2: 119,55 119,15 ccw(c125,15) 125,9 165,9 ; 119,60 119,105 cw(c125,105) 125,111 165,111 ; 119,165 119,125 ccw(c125,125) 125,119 165,119 ; 119,170 119,215 cw(c125,215) 125,221 165,221 ; 170,9 215,9 ccw(c215,15) 221,15 221,55 ; 170,111 215,111 cw(c215,105) 221,105 221,60 ; 170,119 215,119 ccw(c215,125) 221,125 221,165 ; 170,221 215,221 cw(c215,215) 221,215 221,170
Panel Drawing:
  circle w0.5: c5,5 r1.5
  circle w0.5: c225,5 r1.5
  circle w0.5: c225,225 r1.5
  circle w0.5: c5,225 r1.5
  circle w0.5: c225,220 r1
  circle w0.5: c225,215 r1
  circle w0.5: c225,15 r1
  circle w0.5: c225,10 r1
  circle w0.5: c5,15 r1
  circle w0.5: c5,10 r1
  circle w0.5: c5,220 r1
  circle w0.5: c5,215 r1
  lines w1: 0,0 230,0 230,230 0,230 0,0
  text "x12" at 225,234.5 h3
  text "x4" at 21,226.5 h3
  text "x4" at 243.5,226.5 h3
  text "0.3 (Mouse Bites)" at 70,224.064 h3
  text "x4" at 243.5,221.5 h3
  text "x4" at 243.5,216.5 h3
  text "5  x16" at 21.834,123.323 h3
  text "7  x16" at 122.2,113.626 h3
  text "All units are in millimeters." at 12.499,2.531 h3

## Dimensions
109,110.5 to 115.496,110.5 on Panel Drawing
11,122.5 to 17.496,122.5 on Panel Drawing
160,230 to 160.5,222 on Panel Drawing
118,94 to 112,93.5 on Panel Drawing
92.5,118 to 93,112 on Panel Drawing
8,93 to 0,92.5 on Panel Drawing
112,9 to 110,15.5 on Panel Drawing
59.5,220 to 62.04,220 on Panel Drawing
5,225 to 9,226 on Panel Drawing
225,227.5 to 230,225 on Panel Drawing
226,220 to 226,215 on Panel Drawing
226.5,225 to 226,220 on Panel Drawing
230,230 to 226.5,225 on Panel Drawing
205,0 to 230,230 on Panel Drawing
230,230 to 0,230 on Panel Drawing

## Panel: embedded boards
"..\..\PCB.PcbDoc" at 10,10, 2 rows x 2 columns, spacing 110 x 110, rotation 0